# Altium PCB PCB_555ATM.PcbDoc
Units mm, origin at the board's own origin, x right, y up, seen from the top; angles counter-clockwise.
Board outline 70 x 50 mm, 4 copper layers (Top Layer, Internal Plane 1, Internal Plane 2, Bottom Layer), stack 0.462 mm thick; 26 components, 22 nets, 76 pads, 0 vias.
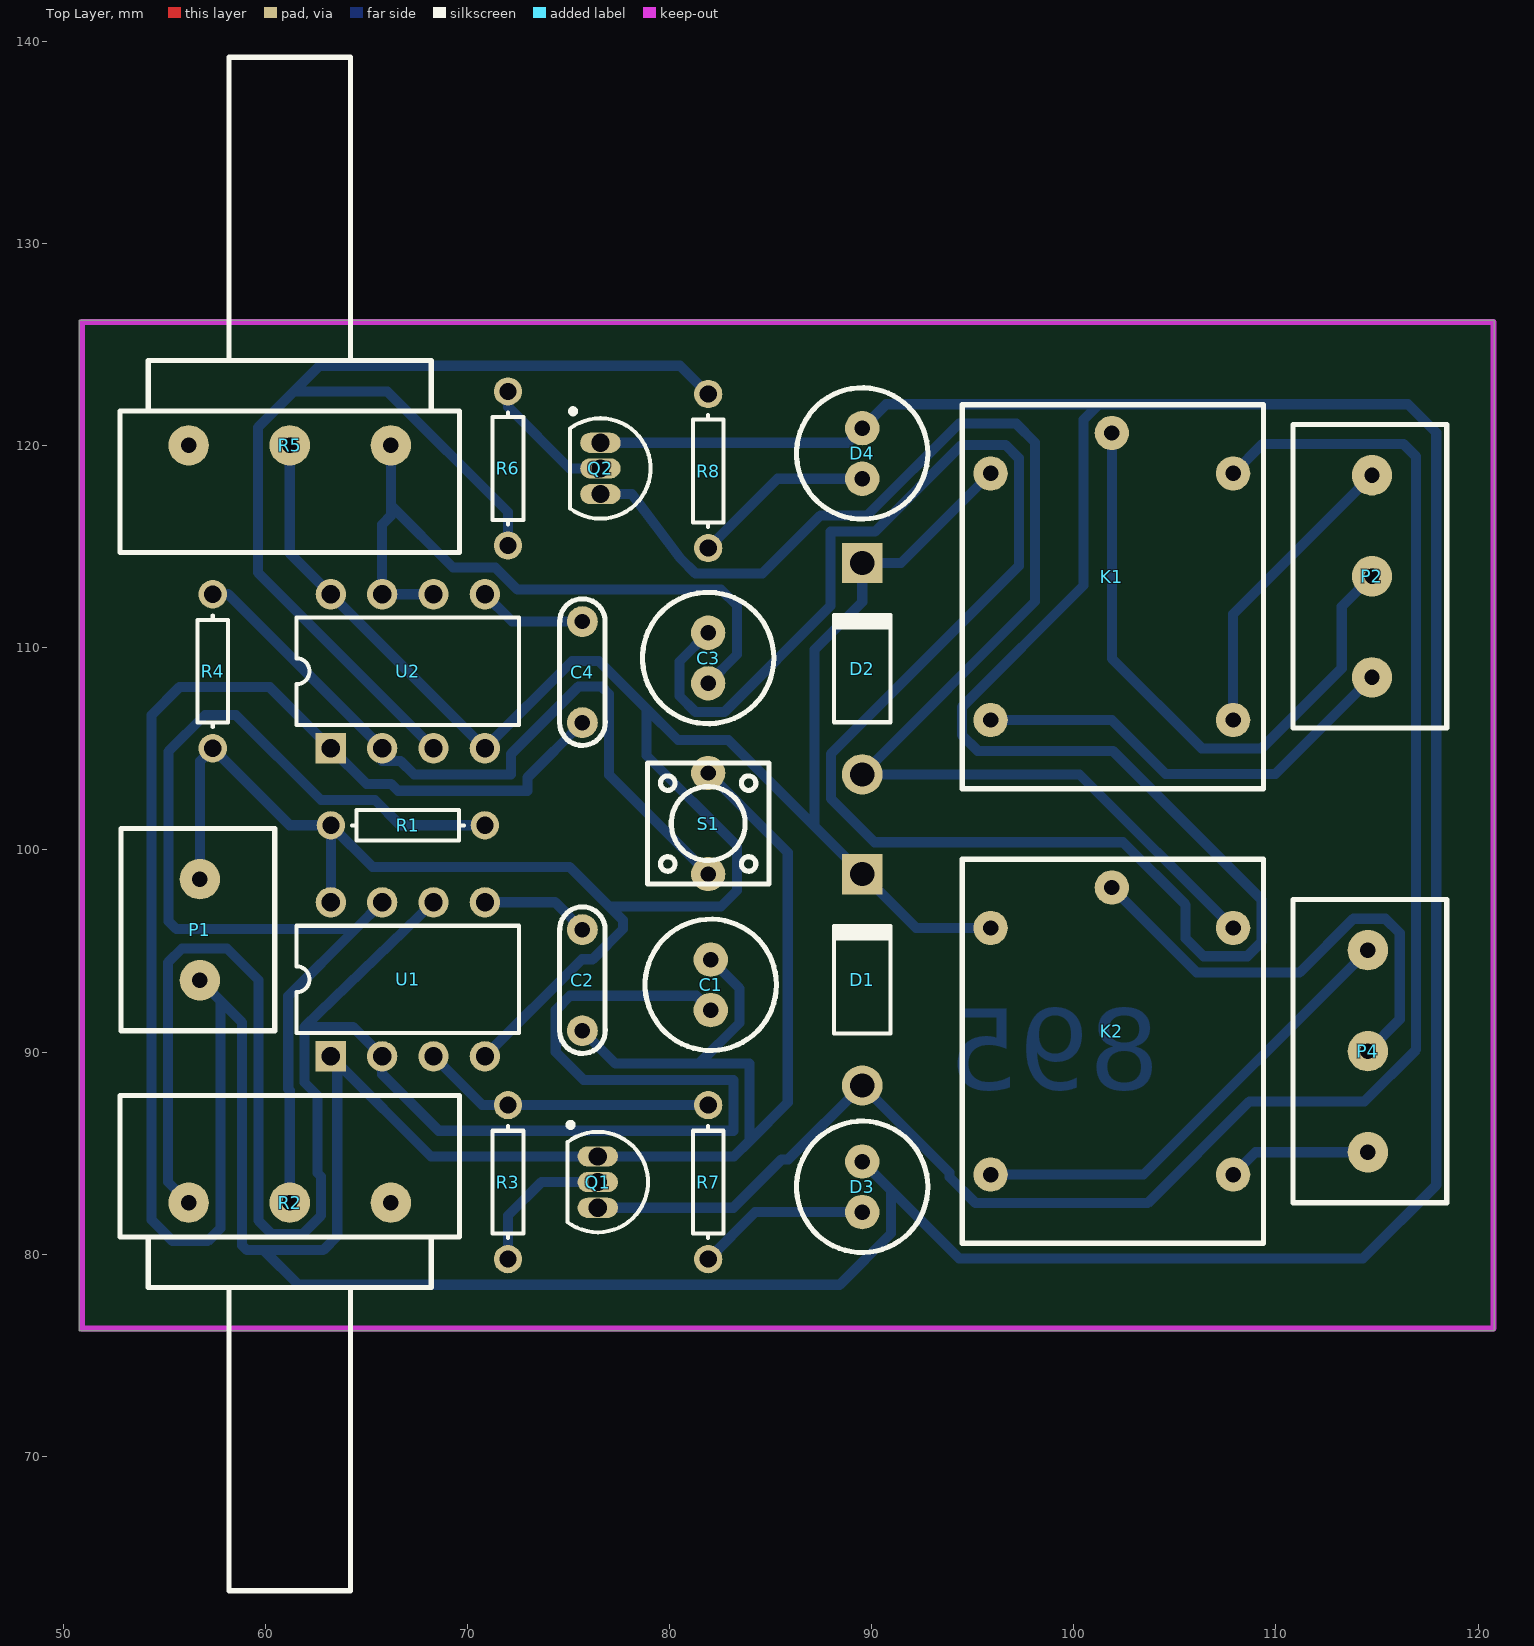
[diagram p0: Top Layer view]
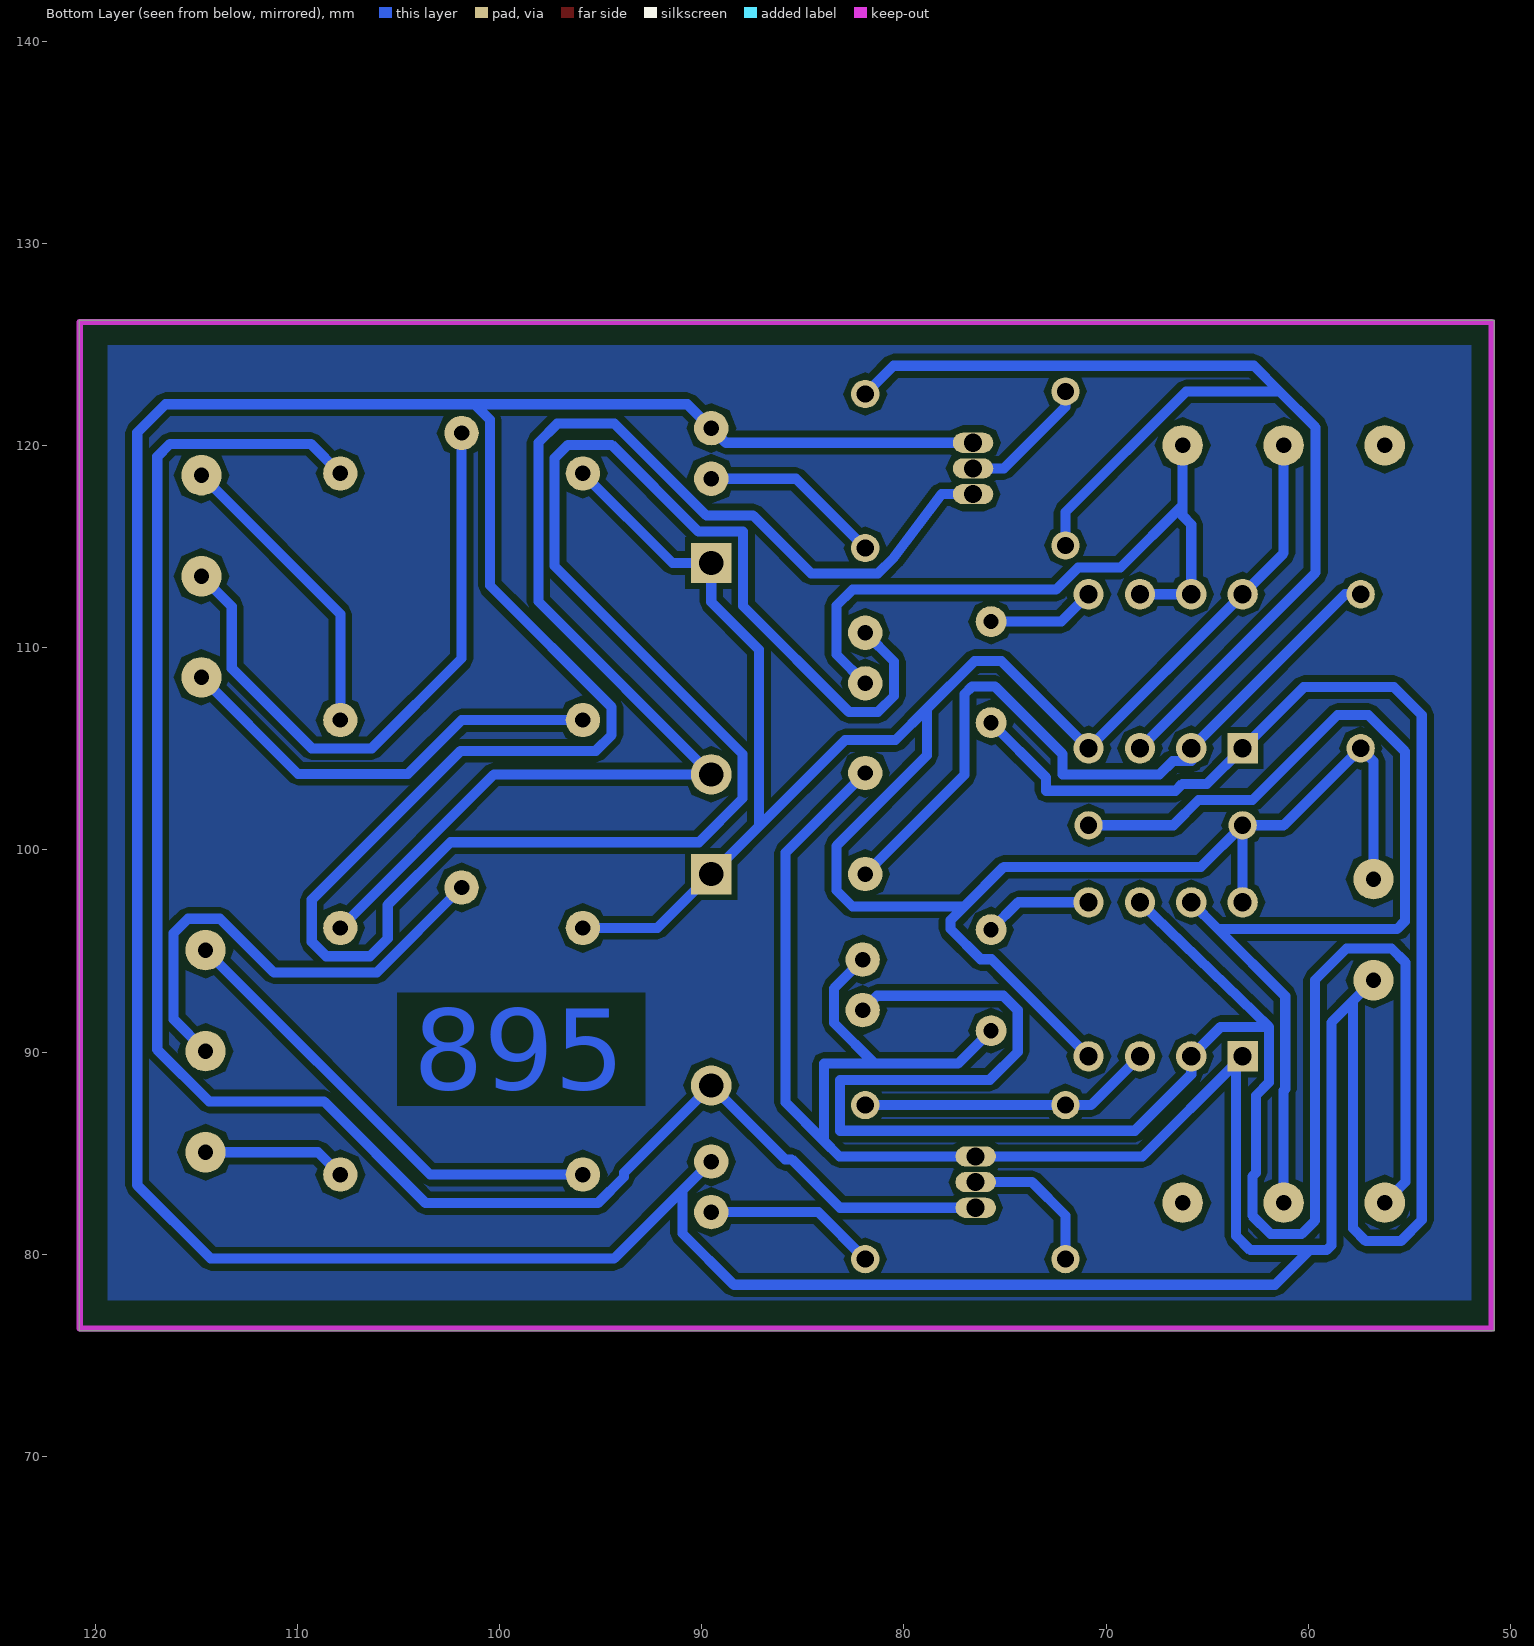
[diagram p1: Bottom Layer view, seen from below]
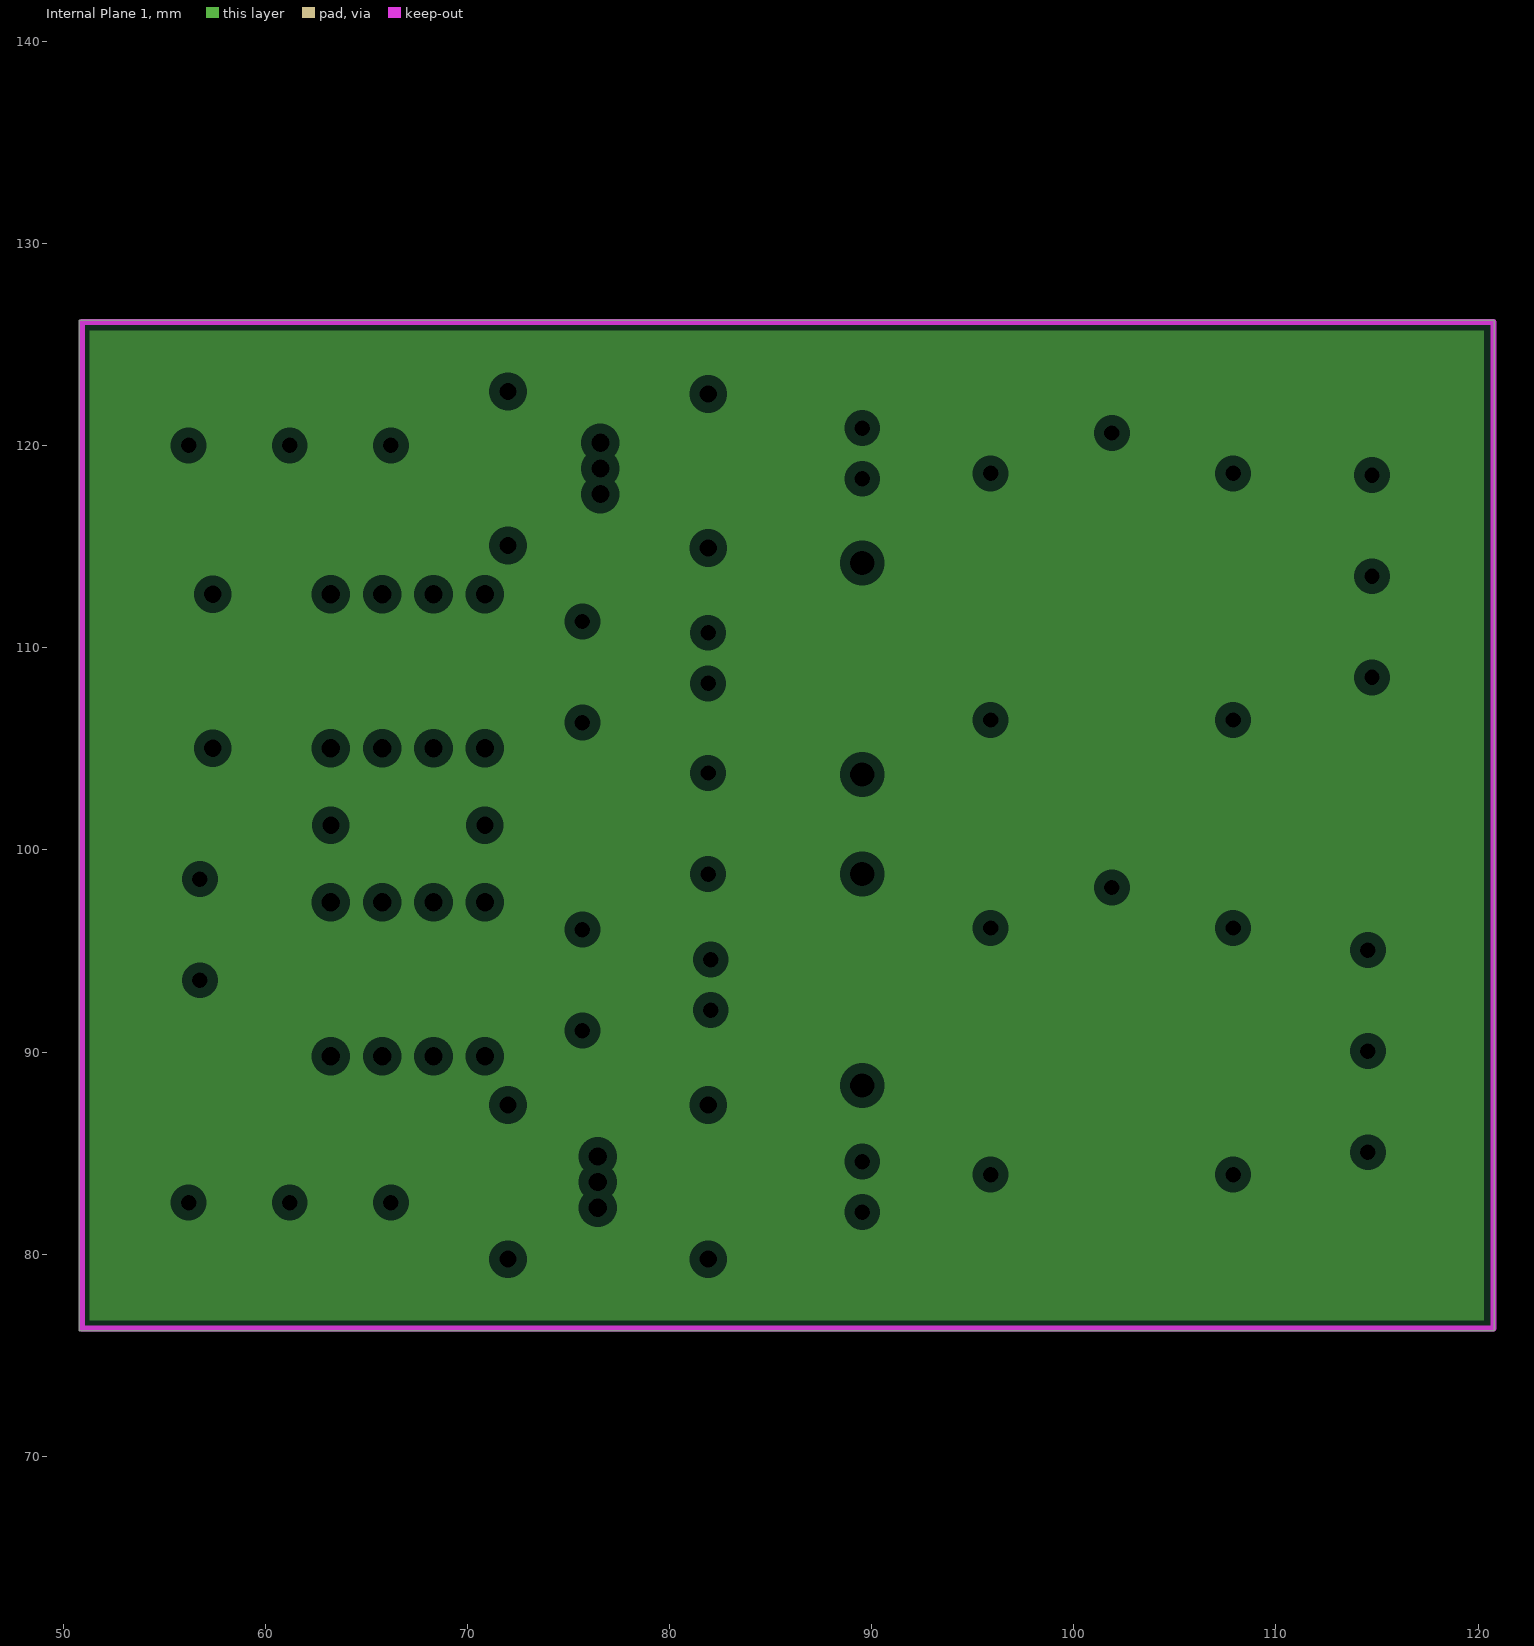
[diagram p2: Internal Plane 1, clearances drawn from the general rule]
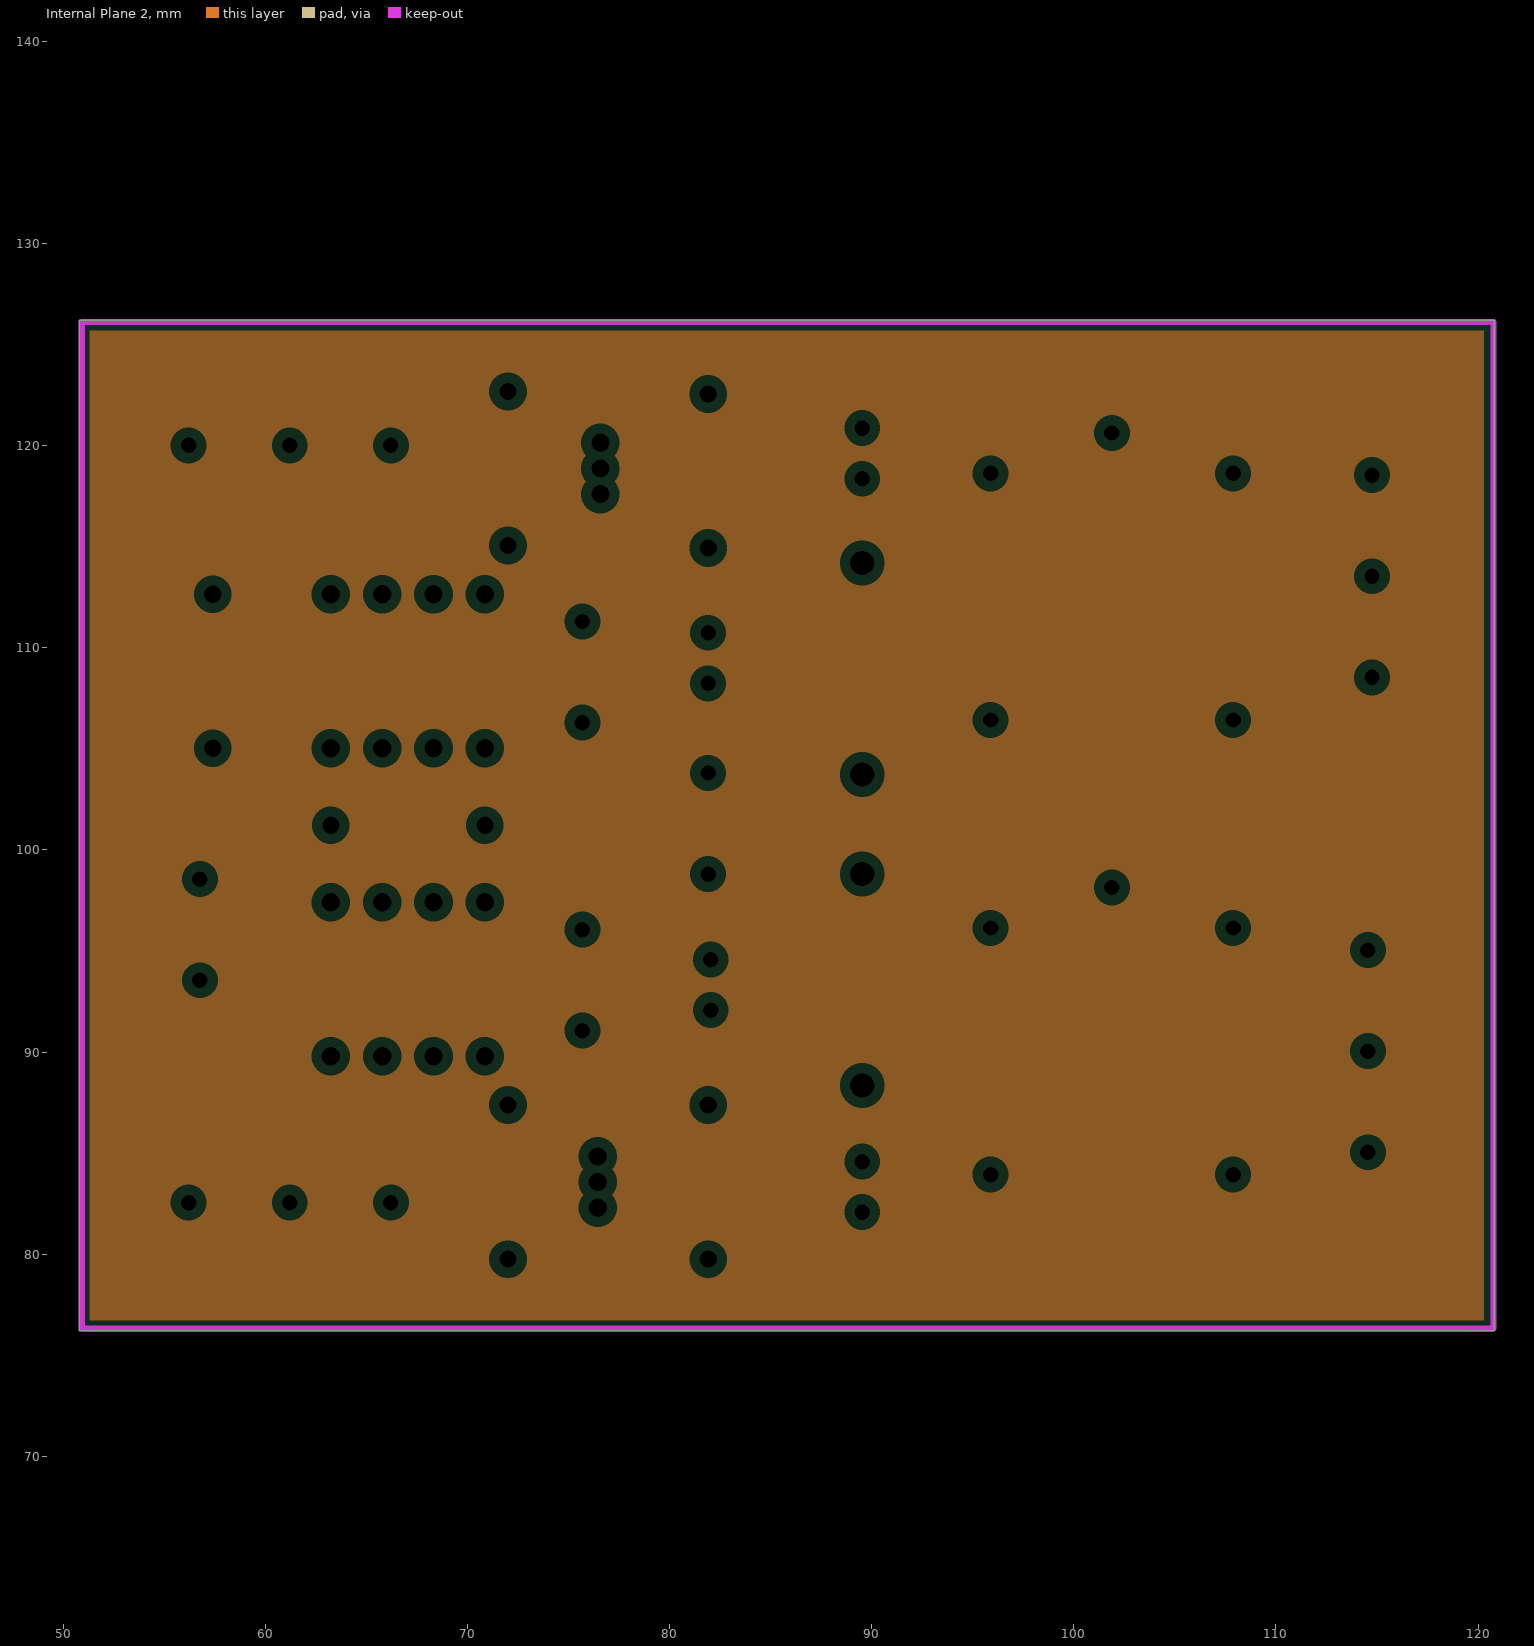
[diagram p3: Internal Plane 2, clearances drawn from the general rule]

## Layer stack, top to bottom
Top Solder: solder mask 0.0102, Solder Resist, Dk 3.5
Top Layer: signal copper 0.0356
Internal Plane 1: plane copper 0.0356
Internal Plane 2: plane copper 0.0356
Dielectric 1: dielectric 0.32, FR-4, Dk 4.8
Bottom Layer: signal copper 0.0356
Bottom Solder: solder mask 0.0102, Solder Resist, Dk 3.5

## Board outline
50.8,76.2 120.8,76.2 120.8,126.2 50.8,126.2

## Design rules (kind name [scope] priority, off if disabled: settings)
Clearance [All] p1: gap=0.3 ignorepadtopadclearanceinfootprint=FALSE
PlaneClearance [All] p1: clearance=0.508
PlaneConnect [All] p1: planeconnectstyle=Relief reliefexpansion=0.508 reliefentries=4 reliefconductorwidth=0.254 reliefairgap=0.254
PolygonConnect [All] p1: connectstyle=Relief reliefconductorwidth=0.254 reliefentries=4 polygonreliefangle="90 Angle" airgapwidth=0.254
RoutingVias [All] p1: holewidth=0.8 width=1.6 viastyle="Through Hole" minholewidth=0.711 minwidth=1.27 maxholewidth=0.711 maxwidth=1.27
SolderMaskExpansion [All] p1: expansion=0.102
Width [All] p1: maxlimit=1 minlimit=0.5 preferedwidth=0.5
28 further rules are at their usual default settings.

## Components (designator, comment, footprint, x,y, rotation, side; value= is the part's Value field where it differs from the comment)
C1 "Cap2" "Cap 100uf 25v" 82.042,92.075 r90 top value=100uF
C2 "Cap" CAP 75.692,91.059 r90 top value=10nF
C3 "Cap2" "Cap 100uf 25v" 81.915,108.244 r90 top value=100uF
C4 "Cap" CAP 75.692,106.299 r90 top value=10nF
D1 "1N4007" DO-41 89.535,93.576 r90 top
D2 "1N4007" DO-41 89.535,108.966 r90 top
D3 "LED1" "Cap 100uf 25v" 89.535,82.082 r90 top
D4 "LED1" "Cap 100uf 25v" 89.535,118.364 r90 top
K1 "Relay" Relay 95.885,118.626 r0 top
K2 "Relay" Relay 95.885,96.139 r0 top
P1 "Voltaje1" TErminal 56.769,96.052 r90 top
P2 "Salida1" TErminal3 114.754,113.538 r90 top
P4 "Salida2" TErminal3 114.554,90.043 r270 top
Q1 "2N2222" TO-92A 76.454,83.566 r180 top
Q2 "2N2222" TO-92A 76.581,118.872 r180 top
R1 "Res1" AXIAL-0.3 67.056,101.219 r180 top value=1K
R2 "RPot" Potenciometro 56.214,82.55 r0 top value=100K
R3 "Res1" AXIAL-0.3 72.009,83.566 r270 top value=330
R4 "Res1" AXIAL-0.3 57.404,108.839 r270 top value=1K
R5 "RPot" Potenciometro 66.214,120.015 r180 top value=100K
R6 "Res1" AXIAL-0.3 72.009,118.872 r90 top value=330
R7 "Res1" AXIAL-0.3 81.915,83.566 r90 top value=1K
R8 "Res1" AXIAL-0.3 81.915,118.745 r90 top value=1K
S1 "SW-SPST" PUSHB 81.915,103.806 r270 top
U1 "NE555P" P008 67.056,93.599 r0 top
U2 "NE555P" P008 67.056,108.839 r0 top

## Footprints (in the part's own frame and the unit in brackets; to place one, negate y for a bottom-side part, rotate by r counter-clockwise, add the part's x,y. Pads: shape width x height; smd on the part's side, far side on the other; paste and mask are expansions set on the pad)
AXIAL-0.3 [mm] "Axial Device, Thru-Hole; 2 Leads; 0.3 in Pin Spacing"
  round 1.4 hole 0.85: 1(-3.81,0) 2(3.81,0)
  silkscreen extent -2.77,-0.76 2.77,0.76
CAP [mil]
  round 60 hole 30: 1(0,0) 2(196.85,0)
  silkscreen extent -44,-44 241,44
"Cap 100uf 25v" [mm]
  round 1.7 hole 0.762: 1(0,0) 2(2.5,0)
  silkscreen extent -2,-3.25 4.5,3.25
DO-41 [mm] "Diode, Axial; Body 5.2 x 2.7 mm (LxDia. max), Lead Dia. 0.86 mm (max)"
  round 2 hole 1.2: 1(-5.23,0)
  rect 2x2 hole 1.2: 2(5.23,0)
  silkscreen extent -2.65,-1.4 2.75,1.4
P008 [mm] "DIP; 8 Leads; Row Spacing 7.62 mm; Pitch 2.54 mm"
  rect 1.5x1.5 hole 0.9: 1(-3.81,-3.81)
  round 1.5 hole 0.9: 2(-1.27,-3.81) 3(1.27,-3.81) 4(3.81,-3.81) 5(3.81,3.81) 6(1.27,3.81) 7(-1.27,3.81) 8(-3.81,3.81)
  silkscreen extent -5.5,-2.65 5.5,2.65
Potenciometro [mm]
  round 2 hole 0.762: 1(0,0) 2(5,0) 3(10,0)
  silkscreen extent -3.4,-19.2 13.4,5.3
PUSHB [mm]
  round 1.7 hole 0.762: 1(0,0) 2(5,0)
  silkscreen extent -0.5,-3 5.5,3
Relay [mm]
  round 1.7 hole 0.762: 1(6,2) 2(0,-12.2) 3(12,-12.2) 4(0,0) 5(12,0)
  silkscreen extent -1.4,-15.6 13.5,3.4
TErminal [mm]
  round 2 hole 0.762: 1(-2.5,0) 2(2.5,0)
  silkscreen extent -5,-3.7 5,3.9
TErminal3 [mm]
  round 2 hole 0.762: 1(-5,0) 2(0,0) 3(5,0)
  silkscreen extent -7.5,-3.7 7.5,3.9
TO-92A [mm] "TO, Flat Index; 3 In-Line, Axial Leads; Body Dia. 4.5mm; Leads 0.51 x 0.48 mm (max)"
  oval 2x1 hole 0.9: 1(0,-1.27) 2(0,0) 3(0,1.27)
  silkscreen extent -2.48,-2.95 1.5,2.48, body extent -2.48,-2.5 1.5,2.5, height 6.86

## Part data
C1 C2 C3 C4: "Capacitor", Publisher="Altium Limited"
  C1 C3: PackageDescription="Capacitor; 2 Leads", PackageReference=CAPR5-4X5, Published=23-Sep-2002
  C2 C4: LatestRevisionDate=17-Jul-2002, LatestRevisionNote="Re-released for DXP Platform.", PackageDescription="Radial Cap, Thru-Hole; 2 Leads; 0.3 in Pin Spacing", PackageReference=RAD-0.3, Published=8-Jun-2000
D1 D2: library part "Diode 1N4007", "1 Amp General Purpose Rectifier", Code_JEDEC=DO-204-AL, ComponentLink1Description="Manufacturer Link", ComponentLink1URL=http://www.fairchildsemi.com/, ComponentLink2Description=Datasheet, ComponentLink2URL=http://www.fairchildsemi.com/ds/1N%2F1N4001.pdf, DatasheetVersion=1998, LatestRevisionDate=17-Jul-2002, LatestRevisionNote="Re-released for DXP Platform.", PackageDescription="Diode, Axial; Body 5.2 x 2.7 mm (LxDia. max), Lead Dia. 0.86 mm (max)", PackageReference=DO-41, PackageVersion=Aug-1999, Published=8-Jun-2000, Publisher="Altium Limited"
D3 D4: "Typical RED GaAs LED", LatestRevisionDate=08-Jul-2005, LatestRevisionNote="Mech Layer 1 removed.", PackageDescription="LED; 2 Leads", PackageReference=LED-1, Published=8-Jun-2000, Publisher="Altium Limited"
K1 K2: "SPDT Relay", LatestRevisionDate=17-Jul-2002, LatestRevisionNote="Re-released for DXP Platform.", PackageReference=MODULE5B, Published=8-Jun-2000, Publisher="Altium Limited"
P1: library part "Header 2", "Header, 2-Pin", LatestRevisionDate=17-Jul-2002, LatestRevisionNote="Re-released for DXP Platform.", Publisher="Altium Limited"
P2 P4: library part "Header 3", "Header, 3-Pin", LatestRevisionDate=17-Jul-2002, LatestRevisionNote="Re-released for DXP Platform.", Publisher="Altium Limited"
Q1 Q2: library part 2N3904, "NPN General Purpose Amplifier", ComponentLink1Description="Manufacturer Link", ComponentLink1URL=http://www.fairchildsemi.com/, ComponentLink2Description=Datasheet, ComponentLink2URL=http://www.fairchildsemi.com/ds/2N%2F2N3904.pdf, DatasheetVersion=1997, LatestRevisionDate=15-Jan-2003, LatestRevisionNote="PCB Footprint 'BCY-W3/D4.7' replaced", PackageDescription="TO, Flat Index; 3 In-Line, Axial Leads; Body Dia. 4.5mm; Leads 0.51 x 0.48 mm (max)", PackageReference=TO-92A, PackageVersion=Sep-1998, Published=8-Jun-2000, Publisher="Altium Limited"
R1 R3 R4 R6 R7 R8: "Resistor", LatestRevisionDate=17-Jul-2002, LatestRevisionNote="Re-released for DXP Platform.", PackageDescription="Axial Device, Thru-Hole; 2 Leads; 0.3 in Pin Spacing", PackageReference=AXIAL-0.3, Published=8-Jun-2000, Publisher="Altium Limited"
R2 R5: "Potentiometer", LatestRevisionDate=17-Jul-2002, LatestRevisionNote="Re-released for DXP Platform.", PackageDescription="Variable Resistor, Thru-Hole; 3 Leads", PackageReference=VR5, Published=8-Jun-2000, Publisher="Altium Limited", Set Position=0.5, Sim Note="Enter the Resistance value and the set point into parameter fields."
S1: "Single-Pole, Single-Throw Switch", LatestRevisionDate=17-Jul-2002, LatestRevisionNote="Re-released for DXP Platform.", PackageDescription="Switch; 2 Leads", PackageReference=SPST-2, Published=24-Mar-1999, Publisher="Altium Limited"
U1 U2: "Precision Timer", Code_JEDEC=MO-001-AN, ComponentLink1Description="Manufacturer Link", ComponentLink1URL=http://www.ti.com/, ComponentLink2Description=Datasheet, ComponentLink2URL=http://www-s.ti.com/sc/ds/ne555.pdf, DatasheetVersion=Feb-1992, LatestRevisionDate=04-Mar-2005, LatestRevisionNote="Stylized 3D Model Added.", PackageDescription="DIP; 8 Leads; Row Spacing 7.62 mm; Pitch 2.54 mm", PackageReference=P008, PackageVersion=Jun-1999, Published=16-Jan-2001, Publisher="Altium Limited"

## Nets (pads, with @x,y where several pads share a name; then routed paths per layer and width w, separated by ;. In a path a pad name is that pad's centre, name@x,y a point inside that pad or via, vN(x,y) a via of type N, cw(c..) or ccw(c..) an arc to the next point about the centre after c; other vN are vias at no path point)
GND: C1.2 C2.1 C3.2 C4.1 D3.2 D4.2 P1.1 Q1.1 Q2.1 S1.1 U1.1 U2.1 | length 418.3
  Bottom Layer w0.5: P1.1 57.785,92.536 ; U1.1 U1.1@63.564,89.471 ; C2.1 77.325,89.426 81.45,89.426 ; C4.1 72.966,103.573 72.966,102.929 66.566,102.929 66.226,103.269 65.006,103.269 U2.1 60.223,108.052 55.753,108.052 54.381,106.68 54.381,81.686 55.423,80.645 57.15,80.645 57.785,81.28 57.785,92.536 ; Q2.1 88.813,120.142 D4.2 90.718,122.047 101.244,122.047 ; S1.1 85.852,99.869 85.852,87.503 83.965,85.616 ; C3.2 80.493,109.322 80.493,107.62 81.28,106.832 82.728,106.832 87.96,112.065 87.96,115.746 90.168,115.746 94.463,120.04 96.625,120.04 97.285,119.38 97.285,114.046 87.985,104.746 87.985,102.54 90.144,100.381 102.438,100.381 105.537,97.282 105.537,95.618 106.416,94.739 108.585,94.739 109.296,95.45 109.296,97.536 101.93,104.902 95.25,104.902 94.463,105.689 94.463,107.061 100.482,113.081 100.482,121.285 101.244,122.047 ; C1.2 83.464,93.153 83.464,91.44 81.45,89.426 ; D3.2 90.957,83.16 ; 57.785,92.536 58.852,91.469 58.852,80.442 59.094,80.2 59.932,80.2 ; 59.932,80.2 62.865,80.2 63.564,80.899 U1.1@63.564,89.471 ; 59.932,80.2 61.646,78.486 88.417,78.486 90.957,81.026 90.957,83.16 ; U1.1@63.564,89.471 68.199,84.836 Q1.1 83.185,84.836 83.965,85.616 ; 81.45,89.426 83.965,89.426 83.965,85.616 ; 90.957,83.16 94.336,79.781 114.3,79.781 117.932,83.414 117.932,120.65 116.535,122.047 101.244,122.047
NetC1_1: C1.1 R2.1 U1.2 U1.6 | length 98
  Bottom Layer w0.5: R2.1 55.194,83.57 55.194,94.437 55.88,95.123 58.111,95.123 59.664,93.57 59.664,81.661 60.325,81 61.856,81 62.764,81.908 62.764,83.846 62.586,84.024 62.586,87.849 61.946,88.489 61.946,91.248 ; U1.6 61.946,91.248 ; C1.1 81.331,92.786 75.082,92.786 74.371,92.075 74.371,90.005 75.75,88.626 83.165,88.626 83.165,86.106 68.58,86.106 65.786,88.9 U1.2 64.327,91.248 61.946,91.248
NetC2_2: C2.2 U1.5 | length 5.4
  Bottom Layer w0.5: U1.5 74.342,97.409 C2.2
NetC3_1: C3.1 R5.1 U2.6 U2.7 | length 33.7
  Bottom Layer w0.5: R5.1 66.214,117.047 ; U2.6 U2.7 65.786,116.103 66.214,116.531 66.214,117.047 ; C3.1 83.337,109.666 83.337,112.09 82.55,112.878 72.476,112.878 71.384,113.97 69.291,113.97 66.214,117.047
NetC4_2: C4.2 U2.5 | length 5.4
  Bottom Layer w0.5: U2.5 72.216,111.299 C4.2
NetD1_1: D1.1 K1.5 Q1.3 | length 87.9
  Bottom Layer w0.5: Q1.3 83.16,82.296 85.556,84.692 85.881,84.692 D1.1 93.853,84.028 93.853,83.82 95.148,82.525 103.657,82.525 108.687,87.554 114.376,87.554 116.942,90.119 116.942,119.456 116.307,120.091 109.35,120.091 K1.5
NetD2_1: D2.1 K2.5 Q2.3 | length 68.3
  Bottom Layer w0.5: Q2.3 78.145,117.602 80.543,114.422 81.28,113.685 84.602,113.685 87.463,116.546 89.776,116.546 94.321,121.091 97.155,121.091 98.085,120.161 98.085,112.286 D2.1 100.288,103.736 K2.5
NetD3_1: D3.1 R7.1 | length 8.6
  Bottom Layer w0.5: R7.1 84.241,82.082 D3.1
NetD4_1: D4.1 R8.1 | length 9
  Bottom Layer w0.5: R8.1 85.344,118.364 D4.1
NetK1_1: K1.1 P2.2 | length 31.2
  Bottom Layer w0.5: K1.1 101.885,109.468 106.327,105.026 109.296,105.026 113.259,108.988 113.259,112.043 P2.2
NetK1_2: K1.2 P2.1 | length 22
  Bottom Layer w0.5: K1.2 101.879,106.426 104.546,103.759 109.975,103.759 P2.1
NetK1_3: K1.3 P2.3 | length 15
  Bottom Layer w0.5: K1.3 107.885,111.669 P2.3
NetK2_1: K2.1 P4.2 | length 23.9
  Bottom Layer w0.5: K2.1 106.085,93.939 111.176,93.939 113.833,96.596 115.418,96.596 116.129,95.885 116.129,91.618 P4.2
NetK2_2: K2.2 P4.1 | length 23.3
  Bottom Layer w0.5: K2.2 103.45,83.939 P4.1
NetK2_3: K2.3 P4.3 | length 7.1
  Bottom Layer w0.5: K2.3 108.989,85.043 P4.3
NetQ1_2: Q1.2 R3.2 | length 7.3
  Bottom Layer w0.5: R3.2 72.009,81.915 73.66,83.566 Q1.2
NetQ2_2: Q2.2 R6.2 | length 6.6
  Bottom Layer w0.5: R6.2 72.009,121.92 75.057,118.872 Q2.2
NetR1_1: R1.1 R2.2 U1.7 | length 53.3
  Bottom Layer w0.5: R2.2 61.214,88.087 61.138,88.163 61.138,92.761 64.465,96.088 ; U1.7 64.465,96.088 ; R1.1 66.676,101.219 65.426,102.469 62.758,102.469 58.547,106.68 57.023,106.68 55.219,104.876 55.219,96.47 55.601,96.088 64.465,96.088
NetR3_1: R3.1 R7.2 U1.3 | length 14.6
  Bottom Layer w0.5: U1.3 70.739,87.376 R3.1 R7.2
NetR4_1: R4.1 S1.2 U2.2 | length 37.2
  Bottom Layer w0.5: R4.1 58.166,112.649 U2.2 65.786,104.394 66.701,104.394 67.366,103.729 72.166,103.729 72.166,104.754 75.489,108.077 76.643,108.077 77.004,107.716 77.004,103.717 S1.2
NetR6_1: R6.1 R8.2 U2.3 | length 58.3
  Bottom Layer w0.5: U2.3 59.639,113.716 59.639,120.904 61.417,122.682 ; R6.1 72.009,116.713 66.04,122.682 61.417,122.682 ; R8.2 80.518,123.952 62.687,123.952 61.417,122.682
VCC: D1.2 D2.2 K1.4 K2.4 P1.2 R1.2 R4.2 R5.2 U1.4 U1.8 U2.4 U2.8 | length 135.2
  Bottom Layer w0.5: P1.2 56.769,104.394 R4.2 61.214,101.219 R1.2 ; R5.2 61.214,114.681 U2.8 U2.4 75.184,109.347 76.505,109.347 78.867,106.985 ; U1.8 R1.2 ; U1.4 75.667,94.59 76.2,94.59 77.699,96.088 77.699,96.52 77.013,97.206 ; K2.4 92.202,96.139 D1.2 87.173,101.168 ; K1.4 91.455,114.196 D2.2 89.535,112.27 87.173,109.908 87.173,101.168 ; R1.2 65.303,99.162 75.057,99.162 77.013,97.206 ; 77.013,97.206 82.55,97.206 83.337,97.993 83.337,100.203 78.867,104.673 78.867,106.985 ; 78.867,106.985 80.416,105.435 82.906,105.435 87.173,101.168
pads on no net: R2.3 R5.3

## Polygon pours and split planes (outlines as drawn)
no net on Bottom Layer "AutoNaming" (solid, pour order 36): 51.943,124.968 119.38,124.968 119.38,77.724 51.943,77.724

## Keep-outs
Keep-Out Layer:
  lines w0.3: 50.927,76.327 120.777,76.327 120.777,126.111 50.927,126.111 50.927,76.327

## Other copper
Bottom Layer:
  text "895" at 104.267,88.138 h4

## Dimensions
50.927,76.327 to 120.777,76.327 on Mechanical 1
50.927,76.327 to 50.927,126.111 on Mechanical 1